# Altium PCB LKS_Motor_0331.PcbDoc (part 3 of 3)
Units mm, origin at the board's own origin, x right, y up, seen from the top; angles counter-clockwise.
Board outline 117 x 10 mm, 2 copper layers (Top Layer, Bottom Layer); 110 components, 71 nets, 323 pads, 187 vias.
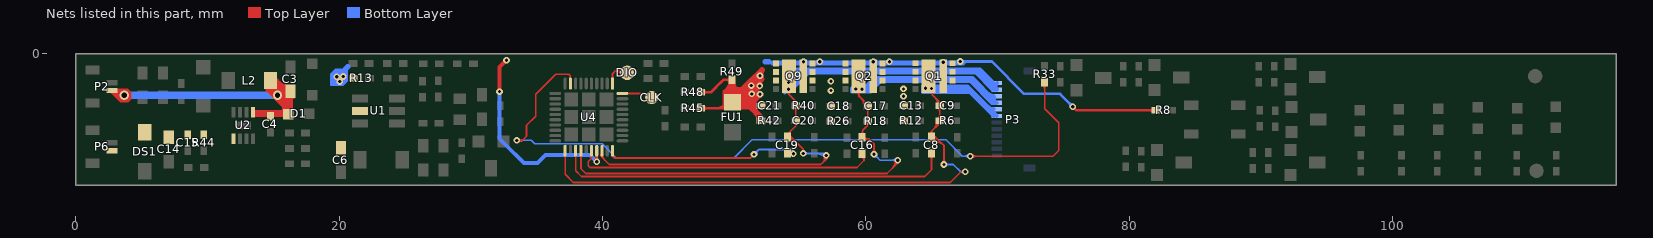
[diagram p3: the nets of this part, all layers, seen from the top]

## Via types
v1: diameter 0.5, hole 0.25, Top Layer to Bottom Layer, 185 vias
v2: diameter 0.7, hole 0.4, Top Layer to Bottom Layer, 2 vias

## Nets (pads, with @x,y where several pads share a name; then routed paths per layer and width w, separated by ;. In a path a pad name is that pad's centre, name@x,y a point inside that pad or via, vN(x,y) a via of type N, cw(c..) or ccw(c..) an arc to the next point about the centre after c; other vN are vias at no path point) (continued)
PGND: C13.1 C18.1 C21.1 FU1.2 Q1.5 Q1.6 Q1.7 Q2.5 Q2.6 Q2.7 Q9.5 Q9.6 Q9.7 R12.2 R26.2 R42.2 R45.1 R48.1 R49.1 | length 76.6
  Top Layer w0.2: R48.1@47.658,-3.03 cw(c47.921,-3.293) 47.921,-2.921 cw(c47.921,-2.549) R48.1@47.658,-2.812 ; R48.1@47.676,-2.921 48.26,-2.921 49.098,-2.083
  Top Layer w0.203: R45.1@47.657,-4.248 cw(c47.917,-4.508) 47.917,-4.14 cw(c47.917,-3.772) R45.1@47.657,-4.032 ; R45.1@47.727,-4.14 48.717,-4.14 ; 48.959,-2.222 49.2,-1.981 R49.1@49.886,-1.981 ; 49.149,-4.14 48.717,-4.14 ; FU1.2@49.276,-4.14 49.225,-4.089 49.225,-2.87 49.708,-2.388 ; 49.431,-2.664 ccw(c48.824,-2.057) R49.1@49.682,-2.057 ; FU1.2@49.436,-4.14 ccw(c49.436,-3.608) FU1.2@49.961,-3.695 ; 49.657,-2.743 49.708,-2.692 49.708,-2.388 ; 49.708,-2.705 cw(c50.445,-2.705) R49.1@49.939,-2.168 ; 49.708,-2.411 cw(c49.919,-2.411) R49.1@49.87,-2.206 ; R49.1@49.727,-2.165 cw(c49.16,-2.732) 49.962,-2.732 ; R49.1@49.727,-2.089 ccw(c49.467,-2.349) 49.467,-1.981 ccw(c49.467,-1.613) R49.1@49.727,-1.873 ; R49.1@49.732,-2.17 cw(c49.416,-2.517) 49.886,-2.517 ; 49.778,-2.318 ccw(c49.518,-2.057) R49.1@49.886,-2.057 ; R49.1@49.784,-2.057 ccw(c50.397,-2.057) 49.964,-2.491 ; FU1.2@49.815,-3.712 ccw(c50.452,-3.452) FU1.2@50.452,-4.14 ; 49.886,-2.515 49.886,-2.413 ; 49.962,-2.743 49.962,-2.057 R49.1@49.886,-1.981 ; 49.972,-2.499 cw(c49.211,-3.26) FU1.2@50.122,-3.832 ; R49.1@49.987,-2.057 ccw(c51.091,-2.057) 50.31,-2.838 ; FU1.2@50.003,-3.635 ccw(c50.754,-3.329) 50.754,-4.14 ; 50.152,-2.679 cw(c49.433,-3.399) FU1.2@50.294,-3.94 ; FU1.2@50.191,-3.558 ccw(c51.057,-3.206) 51.057,-4.14 ; 50.332,-2.86 cw(c49.654,-3.538) FU1.2@50.466,-4.048 ; FU1.2@50.38,-3.482 ccw(c51.359,-3.083) 51.359,-4.14 48.717,-4.14 ; 50.521,-3.048 49.886,-2.413 ; 48.717,-4.14 ccw(c48.717,-3.489) 49.359,-3.596 cw(c48.717,-3.489) 48.717,-4.14 ; 49.708,-2.388 49.886,-2.21 R49.1@49.886,-1.981 ; 49.886,-2.413 R49.1@49.886,-1.981 ; 48.957,-4.14 ccw(c48.957,-3.529) 49.56,-3.629 cw(c48.957,-3.529) 48.957,-4.14 ; 49.197,-4.14 ccw(c49.197,-3.569) 49.76,-3.662 cw(c49.197,-3.569) 49.197,-4.14 ; R49.1@49.756,-2.188 cw(c49.619,-2.417) 49.886,-2.417 ccw(c49.619,-2.417) R49.1@49.756,-2.188
  Top Layer w0.45: FU1.2@49.421,-3.529 cw(c50.086,-3.75) 50.086,-3.048 ; 49.765,-2.851 cw(c49.226,-3.39) FU1.2@49.922,-3.699 ; FU1.2@49.848,-3.67 cw(c50.71,-3.957) 50.71,-3.048 ; FU1.2@49.849,-3.667 cw(c50.4,-3.901) FU1.2@50.4,-3.302 ; FU1.2@50.176,-3.973 cw(c50.63,-4.428) 50.63,-3.785 ; FU1.2@50.248,-3.874 cw(c50.902,-4.218) 50.902,-3.48 ; FU1.2@50.263,-3.843 cw(c51.079,-4.188) 51.079,-3.302 ; FU1.2@50.275,-3.812 cw(c51.333,-4.163) v1(51.333,-3.048) ; 50.521,-2.743 50.622,-2.743 ; 50.658,-2.707 cw(c51.308,-3.357) v1@51.308,-2.438 ; 50.66,-3.302 ccw(c50.66,-2.374) v1@51.316,-3.03 ; 51.003,-3.785 51.714,-4.496 ; 51.026,-3.807 ccw(c51.567,-3.266) C21.1@51.952,-3.927 ; 51.121,-3.785 cw(c51.121,-2.448) 50.176,-3.393 ccw(c51.526,-2.042) 51.526,-3.953 ; 51.207,-2.768 cw(c51.943,-3.505) v1@51.943,-2.463 ; v1@51.283,-2.413 cw(c50.952,-2.413) 50.952,-2.743 ; v1@51.308,-2.388 ccw(c51.308,-1.714) 51.784,-2.191 ; v1@51.309,-3.052 ccw(c50.952,-3.103) 50.952,-2.743 ; v1@51.316,-3.066 cw(c50.905,-3.476) 51.486,-3.476 ; v1@51.333,-2.413 cw(c52.252,-2.413) 51.602,-1.763 ; v1@51.358,-3.048 cw(c52.4,-3.048) 51.663,-2.312 ; 51.41,-4.191 51.714,-4.496 ; 51.449,-1.917 cw(c51.968,-2.436) v1@51.968,-1.701 ; 51.46,-2.743 51.232,-2.743 ; v1@51.486,-3.2 51.486,-3.556 ; 51.551,-2.601 cw(c51.737,-2.524) 51.594,-2.381 ; 51.672,-4.453 cw(c51.029,-5.096) R42.2@51.938,-5.096 ; 51.692,-2.283 ccw(c51.086,-1.676) v1@51.943,-1.676 ; v1(51.943,-2.438) v1(51.333,-3.048) ; v1@51.966,-2.429 cw(c52.41,-2.245) 52.07,-1.905 51.232,-2.743 ; v1(51.968,-3.073) 51.486,-3.556 ; v1@51.993,-1.671 cw(c52.453,-1.577) 52.121,-1.245 50.622,-2.743 ; R42.2@52.043,-5.096 52.043,-4.824 51.714,-4.496 ; C21.1@52.043,-3.953 49.673,-3.953 FU1.2@49.505,-3.785 ; FU1.2@49.505,-3.785 49.505,-2.972 49.835,-3.302 51.079,-3.302 ; FU1.2@49.505,-3.785 50.597,-3.785 ; FU1.2@49.505,-3.785 49.809,-3.48 50.902,-3.48 ; 50.597,-3.785 cw(c50.597,-3.444) 50.274,-3.553 ccw(c50.597,-3.444) 50.597,-3.785 ; 50.597,-3.785 ccw(c50.597,-4.349) 50.185,-3.963 cw(c50.597,-4.349) 50.597,-3.785 ; 50.597,-3.785 51.257,-3.785 ; 50.597,-3.785 50.902,-3.48 ; 50.622,-2.743 49.962,-2.743 49.657,-2.743 49.962,-3.048 v1(51.333,-3.048) ; 50.622,-2.743 50.952,-2.743 ; 50.902,-3.48 51.079,-3.302 ; 50.902,-3.48 51.257,-3.48 ; 50.952,-2.743 51.232,-2.743 ; 51.079,-3.302 51.257,-3.48 ; 51.079,-3.302 v1(51.333,-3.048) ; 51.257,-3.785 51.486,-3.556 ; 51.257,-3.785 51.257,-3.48 ; 51.257,-3.292 cw(c51.578,-3.292) 51.351,-3.066 ccw(c51.578,-3.292) 51.257,-3.292
  other v1: 62.865,-3.226 57.353,-2.794 62.865,-2.667 51.308,-2.413 57.353,-2.083 51.968,-1.676
RED: R33.2 U4.9 | length 60.5
  Top Layer w0.127: v1(33.503,-6.579) 33.528,-6.604 33.909,-6.604 ; v1@33.634,-6.71 cw(c33.892,-6.968) 33.892,-6.604 ; v1@33.656,-6.472 ccw(c33.909,-6.295) 33.909,-6.604 ; U4.9@37.527,-1.891 ccw(c37.431,-1.794) 37.567,-1.794 ccw(c37.703,-1.794) U4.9@37.607,-1.891 ; U4.9@37.567,-2.261 37.567,-1.677 37.44,-1.549 36.449,-1.549 34.925,-3.073 34.925,-4.75 34.239,-5.436 34.239,-6.274 33.909,-6.604 ; v1(67.945,-7.772) 74.219,-7.772 74.651,-7.341 74.651,-5.232 73.584,-4.166 R33.2@73.584,-2.159 ; v1@68.077,-7.904 cw(c68.395,-8.223) 68.395,-7.772 cw(c68.395,-7.322) v1@68.077,-7.641 ; R33.2@73.449,-2.37 cw(c73.124,-2.695) 73.584,-2.695 cw(c74.044,-2.695) R33.2@73.719,-2.37
  Bottom Layer w0.127: v1(33.503,-6.579) 34.595,-6.579 34.849,-6.833 39.98,-6.833 41.072,-7.925 49.962,-7.925 51.359,-6.528 66.091,-6.528 67.335,-7.772 v1(67.945,-7.772) ; v1@33.634,-6.71 cw(c33.953,-7.029) 33.953,-6.579 cw(c33.953,-6.128) v1@33.634,-6.447 ; v1@67.813,-7.904 ccw(c67.495,-8.223) 67.495,-7.772 ccw(c67.495,-7.322) v1@67.813,-7.641
SWCLK: CLK.1 U4.40 | length 2.2
  Top Layer w0.15: U4.40@41.517,-3.011 43.219,-3.011 CLK.1@43.561,-3.353
SWDIO: DIO.1 U4.1 | length 3.6
  Top Layer w0.15: U4.1@40.767,-2.261 40.767,-1.499 40.97,-1.295 ; 41.106,-1.295 ccw(c41.106,-0.669) DIO.1@41.549,-1.112 ; 41.189,-1.295 cw(c41.189,-1.716) DIO.1@41.581,-1.565 ; DIO.1@41.441,-1.619 ccw(c40.97,-1.8) 40.97,-1.295 ; DIO.1@41.859,-1.524 41.631,-1.295 40.97,-1.295
U: C19.1 C20.1 P3.1 P3.2 Q9.10 R40.2 U4.28 | length 95.7
  Top Layer w0.127: U4.28@39.896,-7.691 ccw(c40.139,-7.691) 39.967,-7.862 ; U4.28@39.967,-7.361 39.967,-7.861 40.513,-8.407 56.591,-8.407 56.998,-8.001 v1(56.998,-7.722) ; U4.28@40.023,-7.691 ccw(c40.572,-7.691) 40.184,-8.079 ; Q9.10@53.996,-2.561 ccw(c53.609,-2.174) Q9.10@54.155,-2.174 ; Q9.10@53.996,-2.316 cw(c53.609,-2.702) Q9.10@54.155,-2.702 ; Q9.10@54.004,-2.045 ccw(c53.704,-1.707) Q9.10@54.155,-1.707 54.155,-3.076 ; Q9.10@54.02,-2.894 cw(c53.965,-3.076) 54.155,-3.076 ; Q9.10@54.029,-2.851 cw(c53.89,-3.077) 54.155,-3.077 ; C19.1@54.051,-6.591 cw(c54.051,-7.91) 54.983,-6.977 ; C19.1@54.051,-6.464 cw(c54.051,-7.476) 54.767,-6.761 ; C19.1@54.051,-6.337 cw(c54.051,-7.042) 54.55,-6.544 ; C19.1@54.051,-6.21 cw(c54.051,-6.609) 54.333,-6.327 ; C19.1@54.051,-6.058 ccw(c54.051,-5.905) C19.1@54.16,-6.013 ; C19.1@54.113,-6.236 cw(c54.386,-6.18) 54.189,-5.983 ; 54.155,-3.075 cw(c54.51,-3.075) Q9.10@54.259,-2.824 ; Q9.10@54.155,-2.567 cw(c54.51,-2.567) Q9.10@54.259,-2.316 ; Q9.10@54.155,-2.31 ccw(c54.51,-2.31) Q9.10@54.259,-2.561 ; Q9.10@54.155,-1.802 ccw(c54.51,-1.802) Q9.10@54.259,-2.053 ; C19.1@54.229,-6.394 cw(c54.331,-6.434) 54.331,-6.325 ; C19.1@54.229,-6.255 ccw(c54.331,-6.215) 54.331,-6.325 ; C19.1@54.238,-6.21 cw(c54.663,-6.123) 54.356,-5.817 ; Q9.10@54.291,-2.894 ccw(c54.346,-3.076) 54.155,-3.076 ; C20.1@54.55,-4.961 ccw(c54.225,-4.636) 54.685,-4.636 ccw(c55.145,-4.636) C20.1@54.819,-4.961 ; R40.2@54.55,-4.087 cw(c54.225,-4.412) 54.685,-4.412 cw(c55.145,-4.412) R40.2@54.819,-4.087 ; C20.1@54.567,-5.245 cw(c54.376,-5.488) 54.685,-5.488 ; R40.2@54.582,-3.792 ccw(c54.463,-3.605) 54.685,-3.605 ; R40.2@54.787,-3.792 cw(c54.906,-3.605) 54.685,-3.605 ; C20.1@54.802,-5.245 ccw(c54.994,-5.488) 54.685,-5.488 ; v1(55.245,-7.569) 55.245,-7.239 54.331,-6.325 ; 56.731,-8.268 ccw(c56.423,-7.96) v1@56.825,-7.793 ; 56.865,-8.133 ccw(c56.613,-7.881) v1@56.943,-7.744 ; 57,-7.999 ccw(c56.803,-7.802) v1@57.06,-7.696 ; 39.967,-7.827 cw(c40.103,-7.827) 40.007,-7.731 ccw(c40.103,-7.827) 39.967,-7.827 ; 39.967,-7.827 ccw(c39.831,-7.827) 39.927,-7.731 cw(c39.831,-7.827) 39.967,-7.827 ; 54.155,-3.076 54.685,-3.605 ; 54.331,-6.325 C19.1@54.051,-6.325 54.051,-6.121 54.356,-5.817 ; 54.356,-5.817 54.685,-5.488 ; 54.685,-5.488 54.685,-5.121 54.685,-3.978 54.685,-3.605
  Bottom Layer w0.127: v1(55.245,-7.569) 56.845,-7.569 v1(56.998,-7.722) ; v1@55.377,-7.701 cw(c55.695,-8.019) 55.695,-7.569 cw(c55.695,-7.119) v1@55.377,-7.437 ; 56.179,-7.569 cw(c56.179,-8.54) v1@56.866,-7.853 ; 56.486,-7.569 cw(c56.486,-8.233) v1@56.956,-7.764 ; 56.793,-7.569 cw(c56.793,-7.927) v1@57.045,-7.674
  Bottom Layer w0.3: 53.848,-2.925 cw(c54.66,-2.925) v1@54.186,-2.266 ; 53.848,-2.845 55.27,-1.422 55.651,-1.422 ; 53.848,-2.57 ccw(c54.182,-2.57) v1@54.046,-2.875 ; 53.848,-2.339 cw(c54.239,-2.339) v1@54.011,-2.022 ; v1@53.927,-2.692 cw(c54.548,-2.692) v1@54.109,-2.253 ; v1@53.927,-2.184 cw(c54.303,-2.184) 54.037,-1.919 ; 54.026,-2.464 v1@54.026,-2.337 ; v1@54.039,-2.654 ccw(c53.829,-2.445) v1@54.052,-2.25 ; v1@54.127,-2.592 ccw(c54.127,-1.738) 54.732,-2.342 ; v1@54.127,-2.384 ccw(c54.127,-1.947) 54.436,-2.256 ; v1@54.168,-2.601 cw(c54.387,-2.108) 53.848,-2.108 ; v1@54.179,-2.607 cw(c54.34,-2.337) v1@54.026,-2.337 ; v1@54.227,-2.184 cw(c55.327,-2.184) 54.55,-1.407 ; 54.265,-2.427 ccw(c54.071,-2.233) v1@54.278,-2.053 ; 54.385,-1.978 cw(c54.127,-1.72) 54.127,-2.084 ccw(c54.127,-0.923) 54.949,-1.744 ; 54.388,-2.305 ccw(c54.775,-2.692) 54.227,-2.692 cw(c55.573,-2.692) 54.621,-1.741 ; 55.397,-1.194 54.762,-1.194 53.848,-2.108 ; 65.888,-1.422 65.583,-1.422 ; 65.989,-1.194 65.583,-1.194 ; 67.945,-1.422 68.141,-1.422 ; 67.97,-1.194 67.742,-1.194 ; 68.199,-1.422 67.97,-1.422 ; 68.394,-1.465 P3.2@69.634,-2.705 ; 68.732,-1.6 68.555,-1.422 67.97,-1.422 ; 69.243,-2.013 ccw(c69.71,-1.545) P3.1@69.71,-2.207 ; 69.514,-2.284 cw(c69.076,-2.722) P3.2@69.695,-2.722 ; P3.1@69.647,-2.222 69.354,-2.222 68.707,-1.575 ; P3.2@69.854,-2.722 69.854,-2.366 68.682,-1.194 68.326,-1.194 ; 69.854,-2.494 cw(c70.224,-2.494) P3.1@69.962,-2.232 ; 69.854,-2.449 ccw(c70.224,-2.449) P3.2@69.962,-2.711 ; P3.2@69.952,-2.722 68.805,-1.575 68.707,-1.575 ; 53.848,-2.108 53.848,-2.87 54.204,-2.87 55.651,-1.422 ; v1@54.026,-2.337 55.169,-1.194 65.583,-1.194 ; 55.651,-1.422 65.583,-1.422 ; 65.583,-1.422 67.97,-1.422 ; 65.583,-1.194 67.742,-1.194 ; 67.742,-1.194 68.326,-1.194 ; 68.326,-1.194 68.453,-1.321 68.707,-1.575
  other v1: 54.127,-2.692 54.127,-2.184
V: C16.1 C17.1 P3.3 P3.4 Q2.10 R18.2 U4.24 | length 91.3
  Top Layer w0.127: U4.24@38.327,-7.731 cw(c38.231,-7.827) 38.367,-7.827 cw(c38.503,-7.827) U4.24@38.407,-7.731 ; U4.24@38.367,-7.361 38.367,-8.725 38.735,-9.093 61.62,-9.093 62.433,-8.28 v1(62.433,-8.077) ; Q2.10@59.106,-2.53 ccw(c58.339,-1.707) Q2.10@59.464,-1.707 ; Q2.10@59.179,-2.846 cw(c59.066,-3.228) 59.464,-3.228 ; Q2.10@59.192,-2.623 ccw(c58.611,-1.999) Q2.10@59.464,-1.999 ; Q2.10@59.216,-2.724 cw(c59.116,-3.057) 59.464,-3.057 ; Q2.10@59.252,-2.602 cw(c59.167,-2.887) Q2.10@59.464,-2.887 ; Q2.10@59.267,-2.871 cw(c59.126,-3.178) 59.464,-3.178 ; Q2.10@59.279,-2.716 ccw(c58.883,-2.291) Q2.10@59.464,-2.291 ; Q2.10@59.321,-2.755 cw(c59.217,-2.979) 59.464,-2.979 cw(c59.711,-2.979) Q2.10@59.607,-2.755 ; 59.464,-3.239 cw(c59.837,-3.239) Q2.10@59.756,-2.874 ; 59.464,-3.08 cw(c59.802,-3.08) Q2.10@59.728,-2.75 ; Q2.10@59.464,-2.922 cw(c59.767,-2.922) Q2.10@59.701,-2.627 ; Q2.10@59.464,-2.85 ccw(c59.573,-2.85) Q2.10@59.5,-2.931 ; Q2.10@59.464,-2.763 cw(c59.731,-2.763) Q2.10@59.673,-2.503 ; Q2.10@59.464,-2.605 cw(c59.696,-2.605) Q2.10@59.645,-2.379 ; Q2.10@59.464,-2.564 ccw(c59.831,-2.564) Q2.10@59.585,-2.837 ; Q2.10@59.464,-2.279 ccw(c60.089,-2.279) Q2.10@59.67,-2.743 ; Q2.10@59.464,-1.993 ccw(c60.347,-1.993) Q2.10@59.755,-2.648 ; 59.606,-3.32 cw(c58.948,-3.978) C17.1@59.879,-3.978 ; C16.1@59.607,-6.117 ccw(c59.399,-5.817) 59.765,-5.817 ; Q2.10@59.661,-2.871 ccw(c59.802,-3.178) 59.464,-3.178 ; C16.1@59.762,-6.383 ccw(c59.98,-6.177) 59.98,-6.477 ; 59.765,-5.933 ccw(c60.057,-5.933) C16.1@59.85,-6.139 ; 59.823,-3.537 cw(c59.382,-3.978) C17.1@60.006,-3.978 ; Q2.10@59.84,-2.554 cw(c60.605,-1.707) Q2.10@59.464,-1.707 ; C16.1@59.85,-6.561 cw(c60.053,-6.763) 60.053,-6.477 ; C16.1@59.854,-6.296 ccw(c60.274,-5.9) 60.274,-6.477 ; C16.1@59.866,-6.35 C16.1@59.866,-6.366 ; C16.1@59.873,-6.532 cw(c59.978,-6.602) 59.978,-6.477 ; C16.1@59.882,-6.35 C16.1@59.866,-6.366 ; C16.1@59.905,-6.41 ccw(c59.978,-6.404) 59.978,-6.477 ; R18.2@60.011,-4.986 ccw(c59.686,-4.661) 60.146,-4.661 ccw(c60.606,-4.661) R18.2@60.28,-4.986 ; C17.1@60.011,-4.113 cw(c59.686,-4.438) 60.146,-4.438 cw(c60.606,-4.438) C17.1@60.28,-4.113 ; R18.2@60.057,-5.29 cw(c59.981,-5.436) 60.146,-5.436 ; R18.2@60.234,-5.29 ccw(c60.31,-5.436) 60.146,-5.436 ; v1@60.498,-7.488 ccw(c60.18,-7.17) 60.63,-7.17 ccw(c61.08,-7.17) v1@60.762,-7.488 ; v1(60.63,-7.62) 60.63,-6.833 60.274,-6.477 ; 61.971,-8.742 ccw(c61.306,-8.077) v1@62.247,-8.077 ; 62.188,-8.526 ccw(c61.739,-8.077) v1@62.374,-8.077 ; 59.464,-3.178 60.146,-3.859 C17.1@60.146,-3.978 R18.2@60.146,-5.121 60.146,-5.436 ; 59.464,-3.178 Q2.10@59.464,-1.707 ; 59.765,-5.817 60.146,-5.436 ; 59.765,-5.817 59.765,-6.264 C16.1@59.866,-6.366 ; 59.978,-6.477 60.274,-6.477
  Bottom Layer w0.127: v1@60.63,-7.806 cw(c60.63,-8.257) 60.948,-7.938 cw(c61.267,-7.62) v1@60.816,-7.62 ; v1(60.63,-7.62) 61.087,-8.077 v1(62.433,-8.077) ; v1@62.301,-8.209 ccw(c61.983,-8.527) 61.983,-8.077 ccw(c61.983,-7.627) v1@62.301,-7.945
  Bottom Layer w0.3: 59.045,-2.87 ccw(c59.045,-2.022) v1@59.645,-2.622 ; v1@59.258,-2.692 60.173,-2.692 ; v1@59.304,-2.738 cw(c60.026,-3.46) 60.026,-2.438 ; v1@59.515,-2.692 cw(c59.77,-2.693) 59.77,-2.438 ; v1@59.536,-2.692 cw(c59.536,-2.364) 59.304,-2.596 ccw(c59.965,-1.935) 59.965,-2.87 ; v1@59.6,-2.529 cw(c59.801,-2.814) 60.048,-2.567 ; v1@59.627,-2.739 ccw(c59.131,-2.997) 59.131,-2.438 ; 59.626,-2.438 cw(c59.626,-2.739) v1@59.893,-2.6 ; v1@59.642,-2.506 cw(c59.79,-2.884) 60.077,-2.597 ; v1@59.773,-2.774 cw(c60.009,-3.11) 60.3,-2.819 ; v1@59.789,-2.625 ccw(c60.35,-2.106) 60.35,-2.87 ; v1@59.815,-2.693 cw(c60.071,-2.694) 60.071,-2.438 ; 61.214,-2.083 61.138,-2.083 60.35,-2.87 ; 65.583,-2.083 65.38,-2.083 ; 68.682,-2.642 69.262,-3.222 ; 68.834,-2.794 67.894,-1.854 ; 69.309,-3.04 ccw(c69.71,-2.639) 69.71,-3.207 cw(c69.684,-2.706) 69.329,-3.06 ; 69.467,-3.606 ccw(c69.71,-3.362) P3.4@69.71,-3.707 ; 69.487,-3.218 cw(c68.983,-3.722) P3.4@69.695,-3.722 ; P3.3@69.647,-3.222 69.262,-3.222 ; P3.4@69.952,-3.722 69.583,-3.722 67.944,-2.083 67.716,-2.083 65.38,-2.083 ; 59.131,-2.438 58.953,-2.616 58.953,-2.87 60.35,-2.87 ; 59.131,-2.438 60.071,-2.438 ; 60.071,-2.438 60.071,-2.591 60.173,-2.692 ; 60.071,-2.438 60.655,-1.854 65.71,-1.854 67.894,-1.854 ; 60.173,-2.692 60.782,-2.083 65.38,-2.083 ; 67.894,-1.854 68.123,-1.854 69.762,-3.493 69.762,-3.722 69.262,-3.222 ; P3.3@69.7,-3.232 cw(c69.55,-3.382) 69.762,-3.382 ccw(c69.55,-3.382) P3.3@69.7,-3.232
  other v1: 59.715,-2.692 59.233,-2.667
VB1: C19.2 U4.30 | length 17
  Top Layer w0.15: U4.30@40.767,-7.208 40.767,-7.747 40.919,-7.899 51.257,-7.899 v1(51.511,-7.645) ; U4.30@40.812,-7.691 ccw(c41.057,-7.691) 40.884,-7.864 ; C19.2@54.178,-7.747 cw(c54.545,-8.113) v1@54.545,-7.595 ; C19.2@54.178,-7.493 ccw(c54.422,-7.249) v1@54.422,-7.595 ; C19.2@54.195,-7.514 ccw(c54.356,-7.394) v1@54.356,-7.595 ; C19.2@54.217,-7.688 cw(c54.356,-7.745) v1@54.356,-7.595 ; v1@54.559,-7.595 v1@54.356,-7.595
  Bottom Layer w0.15: v1(51.511,-7.645) 51.905,-7.252 54.343,-7.252 54.559,-7.468 v1@54.559,-7.595 ; v1@51.511,-7.47 ccw(c51.511,-7.048) 51.81,-7.347 ccw(c52.109,-7.645) v1@51.686,-7.645
  other v1: 54.508,-7.595
VB2: C16.2 U4.26 | length 25
  Top Layer w0.127: U4.26@39.127,-7.731 cw(c39.031,-7.827) 39.167,-7.827 cw(c39.303,-7.827) U4.26@39.207,-7.731 ; U4.26@39.167,-7.208 U4.26@39.167,-7.361 39.167,-7.925 38.913,-8.179 38.913,-8.509 39.04,-8.636 59.333,-8.636 59.866,-8.103 C16.2@59.866,-7.636 ; C16.2@59.652,-7.825 cw(c59.547,-8.127) 59.866,-8.127 ; C16.2@59.694,-7.705 cw(c59.609,-7.948) 59.866,-7.948
  Top Layer w0.15: C16.2@59.677,-7.82 cw(c59.626,-8.055) 59.866,-8.055 ; C16.2@59.709,-7.674 cw(c59.667,-7.869) C16.2@59.866,-7.869 ; 59.866,-8.026 C16.2@59.866,-7.636
VB3: C8.2 U4.23 | length 31.2
  Top Layer w0.127: U4.23@37.927,-7.731 cw(c37.831,-7.827) 37.967,-7.827 cw(c38.103,-7.827) U4.23@38.007,-7.731 ; U4.23@37.967,-7.361 37.967,-8.884 38.405,-9.322 64.491,-9.322 64.999,-8.814 C8.2@64.999,-7.544 ; C8.2@64.864,-7.755 cw(c64.539,-8.08) 64.999,-8.08 cw(c65.459,-8.08) C8.2@65.133,-7.755
VBAT_8V4: C6.2 C14.2 C15.2 DS1.1 P6.2 Q1.2 Q1.3 Q1.4 Q1.9 Q2.2 Q2.3 Q2.4 Q2.9 Q9.2 Q9.3 Q9.4 Q9.9 R8.2 R13.1 R44.1 U1.5 U2.5 U4.27 | length 66.1
  Top Layer w0.2: v1@39.467,-8.098 ccw(c39.226,-7.857) 39.567,-7.857 ; v1@39.567,-8.096 U4.27@39.567,-7.361 ; 39.567,-7.827 ccw(c39.95,-7.827) v1@39.679,-8.098 ; v1(75.717,-4.013) 75.997,-4.293 R8.2@81.89,-4.293 ; R8.2@81.832,-4.401 ccw(c81.569,-4.664) 81.569,-4.293 ccw(c81.569,-3.921) R8.2@81.832,-4.184
  Top Layer w0.3: v1@32.283,-2.87 v1(32.182,-2.87) 32.182,-1.016 v1(32.715,-0.483)
  Bottom Layer w0.2: 19.609,-2.316 cw(c20.085,-2.316) v1@19.877,-1.888 ; 19.609,-1.997 cw(c19.93,-1.997) v1@19.79,-1.708 ; 19.636,-1.549 cw(c19.636,-1.777) v1@19.862,-1.746 ; v1@19.663,-1.774 ccw(c19.406,-1.81) 19.406,-1.549 ; 19.685,-2.354 19.609,-2.278 19.609,-1.549 ; 19.726,-2.354 ccw(c19.726,-1.954) v1@20.086,-2.13 ; v1@19.906,-2.042 cw(c19.406,-1.798) 19.406,-2.354 ; 20.041,-1.549 19.609,-1.549 ; 20.043,-1.549 cw(c20.043,-1.964) v1@20.358,-1.695 ; v1@20.206,-1.825 ccw(c19.609,-2.335) 19.609,-1.549 ; 20.371,-1.372 19.583,-1.372 ; v1(67.183,-0.584) 69.571,-0.584 72.034,-3.048 74.752,-3.048 75.095,-3.391 ; v1@67.289,-0.69 cw(c67.545,-0.946) 67.545,-0.584 cw(c67.545,-0.222) v1@67.289,-0.478 ; 19.406,-2.354 20.275,-2.354 20.574,-2.056 20.574,-1.346 20.447,-1.219 19.736,-1.219 19.583,-1.372 ; 19.406,-2.354 19.406,-1.549 ; 19.406,-1.549 19.609,-1.549 ; 19.406,-1.549 19.583,-1.372 ; 75.095,-3.391 v1(75.717,-4.013) 75.095,-3.391 ; 75.461,-3.757 cw(c75.205,-4.013) 75.567,-4.013 ccw(c75.205,-4.013) 75.461,-3.757 ; 75.461,-3.757 ccw(c75.717,-3.501) 75.717,-3.863 cw(c75.717,-3.501) 75.461,-3.757
  Bottom Layer w0.3: v1(32.182,-2.87) 32.182,-6.452 32.563,-6.833 ; 32.385,-6.655 32.563,-6.833 ; v1(39.573,-8.204) 39.065,-7.696 35.687,-7.696 35.077,-8.306 34.036,-8.306 32.563,-6.833
  Bottom Layer w0.4: v1@20.041,-2.058 ccw(c20.041,-1.754) 20.256,-1.969 ; v1@20.285,-1.692 ccw(c19.893,-1.3) 20.447,-1.3 ; v1@20.32,-1.905 20.447,-1.778 20.447,-1.219 20.472,-1.194 ; 20.511,-1.13 20.65,-0.991 ; 52.375,-0.61 52.654,-0.61 ; 52.917,-0.703 v1@67.369,-0.703 ; 54.925,-0.703 ccw(c54.925,-0.264) v1@55.235,-0.574 ; v1@55.306,-0.574 ccw(c55.616,-0.264) 55.616,-0.703 ; 56.169,-0.703 ccw(c56.169,-0.264) v1@56.48,-0.574 ; v1@56.55,-0.574 ccw(c56.861,-0.264) 56.861,-0.703 ; 60.233,-0.703 ccw(c60.233,-0.264) v1@60.544,-0.574 ; v1@60.614,-0.574 ccw(c60.925,-0.264) 60.925,-0.703 ; 61.452,-0.703 ccw(c61.452,-0.264) v1@61.763,-0.574 ; v1@61.834,-0.574 ccw(c62.144,-0.264) 62.144,-0.703 ; 65.603,-0.703 ccw(c65.603,-0.351) v1@65.852,-0.6 ; v1@65.923,-0.6 ccw(c66.172,-0.351) 66.172,-0.703 ; 66.776,-0.703 ccw(c66.776,-0.177) v1@67.148,-0.549
  other v1: 20.041,-2.108 19.812,-1.753 20.32,-1.727 65.888,-0.635 55.27,-0.61 56.515,-0.61 60.579,-0.61 61.798,-0.61
VIN: C3.2 C4.1 D1.1 L2.2 P2.2 U2.1 | length 91.6
  Top Layer w0.3: P2.2@2.701,-2.791 ccw(c2.791,-2.791) P2.2@2.728,-2.855 ; 3.096,-3.02 cw(c3.325,-2.791) 3.001,-2.791 ccw(c3.816,-2.791) 3.24,-3.367 ; 3.251,-2.791 cw(c3.251,-3.38) v2@3.771,-3.103 ; 3.259,-3.116 cw(c3.529,-3.386) v2@3.737,-3.066 ; v2@3.507,-3.244 ccw(c2.751,-3.647) P2.2@2.751,-2.791 ; 3.751,-2.791 cw(c3.751,-3.113) 4.036,-2.961 ; U2.1@13.475,-4.436 15.952,-4.436 16.142,-4.626 16.142,-3.746 ; U2.1@13.501,-4.664 D1.1@15.977,-4.664 ; 13.957,-4.436 cw(c13.957,-5.499) 14.709,-4.747 ccw(c14.509,-4.947) 14.509,-4.664 ; L2.2@14.533,-2.182 ccw(c15.283,-2.182) 14.753,-2.713 ; L2.2@14.545,-2.105 ccw(c15.316,-2.354) 14.743,-2.927 ; 14.559,-2.786 cw(c14.814,-2.786) L2.2@14.801,-2.532 ; C4.1@14.644,-4.535 cw(c14.884,-4.775) C4.1@14.884,-4.436 ; C4.1@14.681,-4.436 cw(c14.681,-4.775) C4.1@14.921,-4.535 ; 14.735,-2.918 ccw(c15.012,-2.641) v2@15.214,-2.978 ; L2.2@14.783,-2.386 16.142,-3.746 ; L2.2@14.783,-1.932 cw(c14.783,-2.856) 15.436,-2.203 ; L2.2@14.812,-2.416 cw(c14.078,-3.15) v2@15.116,-3.15 ; L2.2@14.83,-2.197 ccw(c15.841,-2.523) v2@15.09,-3.274 ; L2.2@14.833,-2.182 ccw(c16.308,-2.182) v2@15.265,-3.225 ; 14.846,-2.807 ccw(c15.211,-2.442) v2@15.287,-2.952 ; L2.2@14.96,-2.032 15.265,-2.032 16.358,-3.124 16.358,-3.48 ; L2.2@15.032,-2.635 ccw(c14.783,-2.884) L2.2@14.783,-2.532 ; 15.057,-4.664 ccw(c15.057,-4.947) 14.856,-4.747 cw(c15.608,-5.499) 15.608,-4.436 ; L2.2@15.062,-2.184 16.358,-3.48 ; L2.2@15.074,-2.323 cw(c14.248,-3.15) v2@15.416,-3.15 ; 15.083,-2.686 ccw(c15.695,-2.073) C3.2@16.178,-2.793 ; L2.2@15.116,-2.289 ccw(c16.366,-2.692) 15.437,-3.621 ; L2.2@15.195,-2.445 ccw(c15.744,-1.897) C3.2@16.177,-2.539 ; 15.201,-4.436 cw(c15.201,-5.517) D1.1@15.966,-4.752 ; 15.244,-2.756 cw(c15.322,-3.179) 15.626,-2.875 ; L2.2@15.274,-2.523 cw(c15.615,-2.182) L2.2@15.133,-2.182 ; v2@15.298,-3.051 cw(c15.447,-3.863) C3.2@16.03,-3.279 ; v2@15.316,-3.35 cw(c15.316,-4.387) 16.05,-3.654 ; 15.324,-4.664 ccw(c15.324,-3.758) 15.966,-4.399 ccw(c15.539,-3.972) 16.142,-3.972 ccw(c16.746,-3.972) D1.1@16.319,-4.399 ; v2@15.34,-2.944 ccw(c15.902,-2.382) C3.2@16.345,-3.042 ; 15.341,-2.463 ccw(c14.783,-3.022) 14.783,-2.232 cw(c14.783,-3.88) C3.2@15.948,-2.715 ; v2@15.381,-3.342 cw(c14.148,-4.575) D1.1@15.892,-4.575 ; 15.411,-2.534 ccw(c15.795,-2.15) C3.2@16.154,-2.557 ; 15.437,-2.203 ccw(c16.17,-1.471) C3.2@16.282,-2.501 ; 15.453,-2.702 ccw(c15.951,-2.204) C3.2@16.345,-2.788 ; v2@15.506,-3.213 ccw(c16.087,-3.405) 15.654,-3.838 ; v2@15.516,-3.15 ccw(c16.306,-3.15) 15.747,-3.708 ; v2@15.524,-3.128 cw(c16.47,-2.182) L2.2@15.133,-2.182 ; 15.586,-2.835 cw(c15.272,-3.15) 15.716,-3.15 ; v2@15.598,-3.202 ccw(c16.11,-2.691) C3.2@16.512,-3.291 ; 15.636,-2.886 ccw(c14.783,-3.739) L2.2@14.783,-2.532 ; 15.637,-2.76 ccw(c16.007,-2.39) C3.2@16.352,-2.782 ; 15.672,-4.436 16.142,-3.965 16.142,-3.746 ; 15.71,-2.959 ccw(c16.158,-2.511) C3.2@16.513,-3.036 ; 15.777,-3.737 cw(c17.332,-2.182) L2.2@15.133,-2.182 ; 15.829,-3.79 15.829,-4.013 ; 15.853,-2.975 ccw(c14.783,-4.046) L2.2@14.783,-2.532 ; 15.879,-2.646 ccw(c16.257,-2.269) C3.2@16.314,-2.799 ; 15.893,-3.854 cw(c15.172,-4.575) D1.1@16.192,-4.575 ; D1.1@15.969,-4.396 ccw(c15.085,-3.48) 16.358,-3.48 ; D1.1@16.002,-4.369 ccw(c15.82,-4.103) 16.142,-4.103 ; D1.1@16.028,-4.353 ccw(c15.931,-4.166) 16.142,-4.166 ; D1.1@16.064,-4.523 16.358,-4.23 16.358,-3.48 ; D1.1@16.142,-4.575 15.829,-4.262 15.829,-4.013 ; 16.142,-3.763 cw(c16.876,-3.763) C3.2@16.443,-3.171 ; 16.142,-3.424 cw(c16.353,-3.424) C3.2@16.331,-3.214 ; C3.2@16.143,-3.148 cw(c15.626,-3.665) 16.358,-3.665 ; D1.1@16.177,-4.611 ccw(c15.767,-4.186) D1.1@16.358,-4.186 ; D1.1@16.257,-4.353 cw(c16.353,-4.166) 16.142,-4.166 ; D1.1@16.283,-4.369 cw(c16.464,-4.103) 16.142,-4.103 ; C3.2@16.46,-3.227 ccw(c14.783,-4.905) L2.2@14.783,-2.532 ; P2.2@2.751,-2.791 3.324,-2.791 ; P2.2@2.751,-2.791 3.883,-2.791 4.064,-2.972 4.064,-3.404 3.912,-3.556 3.429,-3.556 2.751,-2.878 P2.2@2.751,-2.791 ; P2.2@2.751,-2.791 2.867,-2.791 3.226,-3.15 3.324,-3.051 3.324,-2.791 ; P2.2@2.751,-2.791 3.324,-2.791 ; 3.324,-2.791 v2(3.683,-3.15) 3.324,-2.791 ; 14.783,-2.743 cw(c15.057,-2.743) 14.936,-2.496 ccw(c15.057,-2.743) 14.783,-2.743 ; 14.783,-2.743 ccw(c14.508,-2.743) 14.629,-2.496 cw(c14.508,-2.743) 14.783,-2.743 ; 14.783,-2.743 16.142,-4.103 ; 14.783,-2.743 L2.2@14.783,-2.032 ; L2.2@14.783,-2.032 14.559,-2.255 14.559,-2.743 15.829,-4.013 ; L2.2@14.783,-2.032 16.142,-3.392 16.142,-3.746 ; 16.142,-4.166 16.142,-4.103 ; 16.358,-3.42 cw(c16.742,-3.42) C3.2@16.47,-3.148 ; 16.358,-3.42 cw(c16.742,-3.42) C3.2@16.47,-3.148 ; 16.358,-3.42 cw(c16.742,-3.42) C3.2@16.47,-3.148 ; C3.2@16.188,-3.183 cw(c16.008,-3.482) 16.358,-3.482 ccw(c16.008,-3.482) C3.2@16.188,-3.183
  Bottom Layer w0.3: 14.503,-3.15 v2(15.316,-3.15) ; v2@15.175,-3.291 ccw(c14.833,-3.632) 14.833,-3.15 ccw(c14.833,-2.667) v2@15.175,-3.008
  Bottom Layer w0.6: v2(3.683,-3.15) 14.503,-3.15 v2(15.316,-3.15)
VS3: C8.1 C9.1 P3.5 P3.6 Q1.10 R6.2 U4.21 | length 80.4
  Top Layer w0.127: U4.21@37.127,-7.731 cw(c37.031,-7.827) 37.167,-7.827 cw(c37.303,-7.827) U4.21@37.207,-7.731 ; U4.21@37.167,-6.954 U4.21@37.167,-7.361 37.167,-9.151 37.795,-9.779 66.421,-9.779 67.234,-8.966 v1(67.564,-8.966) ; Q1.10@64.777,-1.698 65.049,-1.97 65.049,-3.099 65.611,-3.661 ; Q1.10@64.867,-2.51 ccw(c64.426,-2.069) Q1.10@65.049,-2.069 ; Q1.10@64.891,-2.794 cw(c64.671,-3.102) 65.049,-3.102 ; C8.1@64.893,-6.09 ccw(c64.762,-5.893) 64.999,-5.893 ; Q1.10@64.957,-2.6 ccw(c64.732,-2.375) Q1.10@65.049,-2.375 ; C8.1@64.999,-6.591 cw(c64.999,-7.971) 65.974,-6.995 ; C8.1@64.999,-6.464 cw(c64.999,-7.537) 65.757,-6.779 ; C8.1@64.999,-6.337 cw(c64.999,-7.104) 65.541,-6.562 ; C8.1@64.999,-6.325 64.999,-5.893 ; C8.1@64.999,-6.21 cw(c64.999,-6.67) 65.324,-6.345 ; 65.049,-2.969 cw(c65.326,-2.969) Q1.10@65.13,-2.773 ; Q1.10@65.049,-2.912 cw(c65.255,-2.912) Q1.10@65.11,-2.767 ; Q1.10@65.049,-2.314 ccw(c65.326,-2.314) Q1.10@65.13,-2.51 ; C8.1@65.104,-6.09 cw(c65.235,-5.893) 64.999,-5.893 ; 65.134,-5.758 ccw(c64.6,-5.224) R6.2@65.347,-5.114 ; C8.1@65.17,-6.408 cw(c65.303,-6.473) 65.303,-6.325 ; C8.1@65.17,-6.241 ccw(c65.303,-6.176) 65.303,-6.325 ; 65.173,-3.223 cw(c64.453,-3.943) C9.1@65.472,-3.943 ; C8.1@65.227,-6.325 65.303,-6.325 ; 65.312,-5.579 ccw(c64.911,-5.178) R6.2@65.472,-5.095 ; 65.39,-3.439 cw(c64.886,-3.943) C9.1@65.599,-3.943 ; R6.2@65.477,-4.952 ccw(c65.151,-4.626) 65.611,-4.626 ccw(c66.071,-4.626) R6.2@65.746,-4.952 ; C9.1@65.477,-4.078 cw(c65.151,-4.403) 65.611,-4.403 cw(c66.071,-4.403) C9.1@65.746,-4.078 ; 65.491,-5.4 ccw(c65.223,-5.132) R6.2@65.598,-5.077 ; C9.1@65.54,-3.767 ccw(c65.497,-3.661) 65.611,-3.661 ; 65.607,-3.656 cw(c65.32,-3.943) C9.1@65.726,-3.943 ; C9.1@65.683,-3.767 cw(c65.726,-3.661) 65.611,-3.661 ; v1@65.807,-8.276 ccw(c65.488,-7.957) 65.938,-7.957 ccw(c66.389,-7.957) v1@66.07,-8.276 ; v1(65.938,-8.407) 65.938,-6.96 65.303,-6.325 ; 64.999,-5.893 65.611,-5.28 R6.2@65.611,-5.086 C9.1@65.611,-3.943 65.611,-3.661
  Bottom Layer w0.127: v1(65.938,-8.407) 66.65,-8.407 67.208,-8.966 ; v1@66.07,-8.539 cw(c66.389,-8.858) 66.389,-8.407 cw(c66.389,-7.957) v1@66.07,-8.276 ; v1@67.411,-9.072 ccw(c67.208,-9.212) 67.208,-8.966 ; v1@67.411,-8.86 cw(c67.208,-8.72) 67.208,-8.966 ; v1(67.564,-8.966) 67.208,-8.966
  Bottom Layer w0.3: v1@64.389,-2.489 cw(c64.389,-3.251) v1@64.928,-2.712 ; v1@64.4,-2.758 ccw(c64.733,-2.425) 64.733,-2.896 ; v1@64.541,-2.667 v1(64.541,-2.616) ; v1@64.612,-2.687 cw(c65.089,-3.164) v1@65.089,-2.489 ; v1@64.612,-2.545 ccw(c65.457,-1.7) 65.457,-2.896 ; 64.77,-2.896 64.364,-2.896 ; v1@64.857,-2.783 ccw(c65.129,-2.511) 65.129,-2.896 ; v1@64.999,-2.718 v1(64.999,-2.642) 67.666,-2.642 ; v1@65.069,-2.712 cw(c65.608,-3.251) 65.608,-2.489 ; v1@65.069,-2.571 ccw(c65.853,-1.787) 65.853,-2.896 ; 68.026,-3.002 67.92,-2.896 67.539,-2.896 64.364,-2.896 ; 69.281,-4.029 ccw(c69.71,-3.6) P3.5@69.71,-4.207 ; 69.321,-4.068 ccw(c69.661,-3.728) P3.5@69.709,-4.207 ; 69.498,-4.245 cw(c69.022,-4.722) P3.6@69.695,-4.722 ; P3.5@69.647,-4.222 69.246,-4.222 ; P3.6@69.748,-4.722 P3.6@69.746,-4.722 ; P3.6@69.952,-4.722 69.952,-4.699 69.746,-4.493 ; 64.364,-2.896 ccw(c64.364,-2.249) 64.914,-2.589 cw(c64.364,-2.249) 64.364,-2.896 ; 64.364,-2.896 64.364,-2.489 67.513,-2.489 ; 67.513,-2.489 67.742,-2.489 69.746,-4.493 ; 67.513,-2.489 67.666,-2.642 ; 67.666,-2.642 68.275,-3.251 69.246,-4.222 ; 69.246,-4.222 P3.6@69.746,-4.722 ; P3.6@69.746,-4.722 69.746,-4.493 ; 64.902,-2.896 ccw(c64.902,-2.582) 65.169,-2.747 cw(c64.902,-2.582) 64.902,-2.896
pads on no net: U2.7 U4.12 U4.13 U4.14 U4.15 U4.17 U4.31 U4.32 U4.34

## Polygon pours and split planes (outlines as drawn)
GND on Top Layer "Top Layer-No Net" (solid, remove dead copper, pour order 0): -1.397,2.184 -1.397,-13.487 -0.457,-14.427 1.803,-16.688 127.051,-16.688 127.051,0.584 123.774,3.861
VBAT_8V4 on Top Layer "Top Layer-No Net" (solid, remove dead copper, pour order 1): 2.362,-7.188 2.362,-7.722 2.362,-7.747 2.464,-7.849 2.489,-7.874 3.277,-7.874 3.937,-7.874 4.343,-7.468 4.369,-7.442 4.369,-7.036 4.369,-6.934 4.547,-6.756 4.597,-6.706 5.08,-6.706 6.375,-6.706 6.579,-6.909 6.604,-6.934 6.934,-6.934 7.569,-6.934 7.671,-6.833 7.899,-6.604 8.433,-6.604 10.516,-6.604 10.693,-6.782 11.049,-7.137 11.049,-7.544 11.049,-9.373 11.379,-9.703 11.455,-9.779 12.624,-9.779 18.72,-9.779 19.152,-9.347 19.253,-9.246 19.253,-9.093 19.253,-7.95 19.38,-7.823 19.914,-7.823 20.574,-7.823 20.65,-7.747 20.65,-7.671 20.65,-4.801 20.726,-4.724 20.752,-4.724 22.123,-4.724 22.174,-4.674 22.2,-4.648 22.2,-4.394 22.2,-4.089 22.123,-4.013 20.828,-4.013 20.726,-4.013 20.65,-3.937 20.625,-3.912 20.625,-3.632 20.625,-2.794 20.93,-2.489 21.158,-2.261 21.438,-2.261 21.488,-2.261 21.565,-2.184 21.565,-1.676 21.565,-1.549 21.488,-1.473 21.463,-1.448 20.98,-1.448 19.761,-1.448 19.329,-1.88 19.329,-2.337 19.329,-5.842 19.101,-6.071 18.415,-6.756 18.415,-7.798 18.415,-8.941 18.313,-9.042 17.907,-9.042 12.471,-9.042 12.344,-8.915 12.116,-8.687 12.116,-7.112 12.116,-6.045 11.989,-6.045 11.659,-6.045 11.201,-5.588 11.125,-5.512 10.516,-5.512 6.172,-5.512 5.893,-5.232 5.867,-5.207 5.563,-5.207 4.648,-5.207 4.293,-5.563 3.962,-5.893 3.962,-6.045 3.962,-6.782 3.556,-7.188
VBAT_8V4 on Top Layer "Top Layer-No Net" (solid, pour order 2): 66.316,-2.235 67.172,-2.235 67.172,-1.118 67.417,-0.864 67.564,-0.711 67.564,-0.457 67.564,-0.279 67.491,-0.203 67.27,-0.203 65.729,-0.203 65.557,-0.381 65.557,-0.762 65.557,-2.921 65.606,-2.972 65.973,-2.972 66.169,-2.972 66.169,-2.667 66.169,-2.388 66.316,-2.235
VBAT_8V4 on Top Layer "Top Layer-No Net" (solid, pour order 3): 61.007,-2.235 61.864,-2.235 61.864,-1.118 62.109,-0.864 62.255,-0.711 62.255,-0.457 62.255,-0.279 62.182,-0.203 61.962,-0.203 60.42,-0.203 60.249,-0.381 60.249,-0.762 60.249,-2.921 60.298,-2.972 60.665,-2.972 60.861,-2.972 60.861,-2.667 60.861,-2.388 61.007,-2.235
VBAT_8V4 on Top Layer "Top Layer-No Net" (solid, pour order 4): 55.699,-2.235 56.555,-2.235 56.555,-1.118 56.8,-0.864 56.947,-0.711 56.947,-0.457 56.947,-0.279 56.873,-0.203 56.653,-0.203 55.111,-0.203 54.94,-0.381 54.94,-0.762 54.94,-2.921 54.989,-2.972 55.356,-2.972 55.552,-2.972 55.552,-2.667 55.552,-2.388 55.699,-2.235
PGND on Top Layer "Top Layer-No Net" (solid, remove dead copper, pour order 1002): 62.433,-3.2 62.433,-5.436 62.484,-5.486 63.144,-5.486 63.271,-5.486 63.322,-5.436 63.322,-5.385 63.322,-2.337 63.424,-2.235 63.652,-2.235 64.033,-2.235 64.033,-1.854 64.033,-0.406 63.983,-0.356 63.5,-0.356 63.271,-0.356 62.967,-0.66 62.433,-1.194 62.433,-2.743
PGND on Top Layer "Top Layer-No Net" (solid, remove dead copper, pour order 1001): 56.871,-3.277 56.871,-5.69 57.81,-5.69 57.887,-5.613 57.912,-5.588 57.912,-3.708 57.912,-2.388 58.014,-2.286 58.064,-2.235 58.217,-2.235 58.725,-2.235 58.725,-1.778 58.725,-0.483 58.699,-0.457 58.674,-0.432 58.014,-0.432 57.633,-0.432 57.455,-0.61 56.871,-1.194 56.871,-1.372
PGND on Top Layer "Top Layer-No Net" (solid, remove dead copper, pour order 1000): 51.537,-2.819 51.537,-5.486 51.562,-5.512 51.587,-5.537 51.613,-5.537 52.451,-5.537 52.502,-5.486 52.502,-5.41 52.502,-2.388 52.578,-2.311 52.629,-2.261 52.857,-2.261 53.416,-2.261 53.416,-2.108 53.416,-0.254 53.315,-0.152 53.188,-0.152 51.74,-0.152 51.562,-0.33
GND on Bottom Layer "Top Layer-No Net" (solid, remove dead copper, pour order 1003): -0.965,2.057 -0.914,2.007 -0.914,-11.633 123.165,-11.633 123.977,-10.82 121.793,-8.636 121.793,4.953
VBAT_8V4 on Bottom Layer "Top Layer-No Net" (solid, remove dead copper, pour order 1004): 19.413,-2.38 20.278,-2.38 21.98,-0.815 22.361,-0.815 67.394,-0.815 67.572,-0.652 67.572,-0.325 67.572,-0.138 67.496,-0.068 52.68,-0.068 21.37,-0.068 20.049,-1.282
PGND on Bottom Layer "Top Layer-No Net" (solid, remove dead copper, pour order 1005): 50.851,-1.092 50.851,-3.962 50.952,-4.064 51.41,-4.064 63.195,-4.064 63.525,-3.734 63.576,-3.683 63.576,-2.845 63.576,-2.667 63.271,-2.362 62.205,-2.362 61.9,-2.362 61.671,-2.591 61.062,-3.2 59.715,-3.2 58.268,-3.2 58.064,-2.997 58.014,-2.946 58.014,-2.438 58.014,-1.93 57.836,-1.753 57.328,-1.753 56.388,-1.753 56.134,-2.007 54.966,-3.175 54.559,-3.175 52.73,-3.175 52.68,-3.124 52.527,-2.972 52.527,-2.819 52.527,-1.092

## Keep-outs
Keep-Out Layer:
  circle w0.1: c96,-7.25 r0.5
  circle w0.1: c96,-2.25 r0.5
  circle w0.1: c114,-7.25 r0.5
  circle w0.1: c114,-2.25 r0.5
  lines w0.1: 0,-10 117,-10 117,0 0,0 0,-10

## Silkscreen, mask and mechanical layers (free items; w line width, h text height)
Top Overlay:
  circle w0.1: c2.134,-7.01 r0.564
  circle w0.1: c2.007,-2.438 r0.432
  lines w0.1: 4.877,-1.956 4.877,-2.946 5.613,-2.946
Bottom Overlay:
  drawing of 23 lines, arcs and shapes, not listed
  text "20240331" at 115.875,-1.6 h1 r90
  text "LKS_074DO_V2.0" at 109.068,-2.073 h1